# Altium PCB ThermoFlagger.PcbDoc
Units mil, origin at the board's own origin, x right, y up, seen from the top; angles counter-clockwise.
Board outline 1125 x 1100 mil, 2 copper layers (Top Layer, Bottom Layer), stack 65.792 mil thick; 37 components, 19 nets, 96 pads, 215 vias.
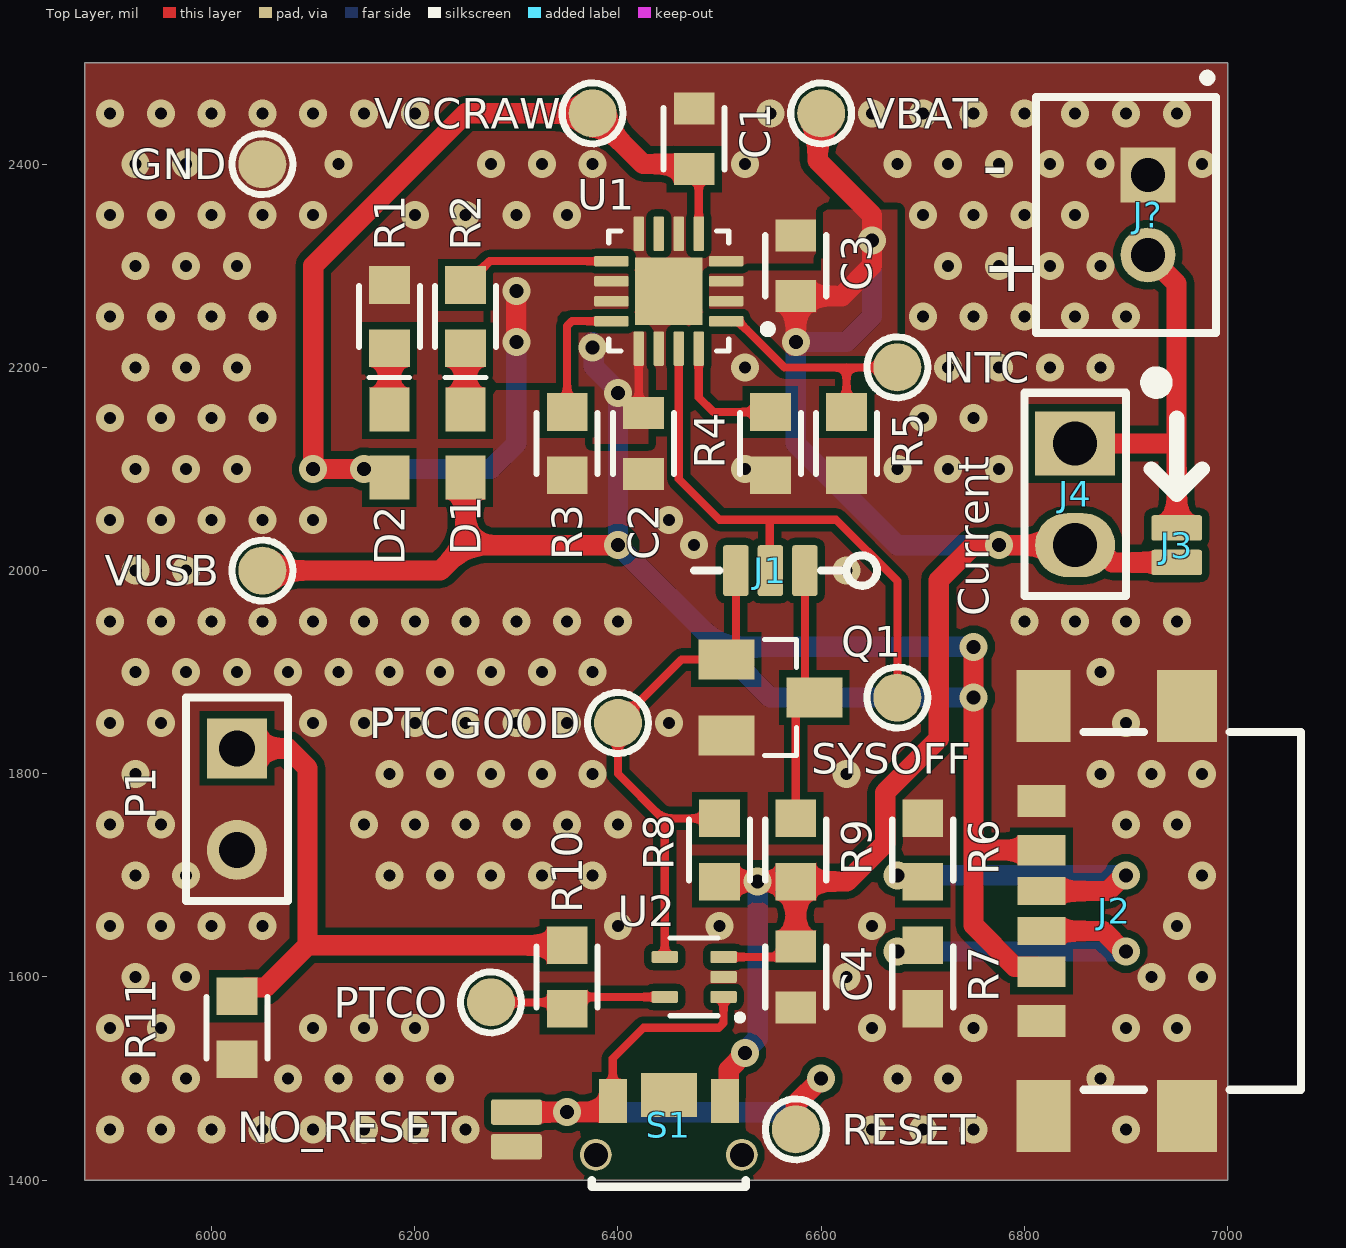
[diagram p0: Top Layer view]
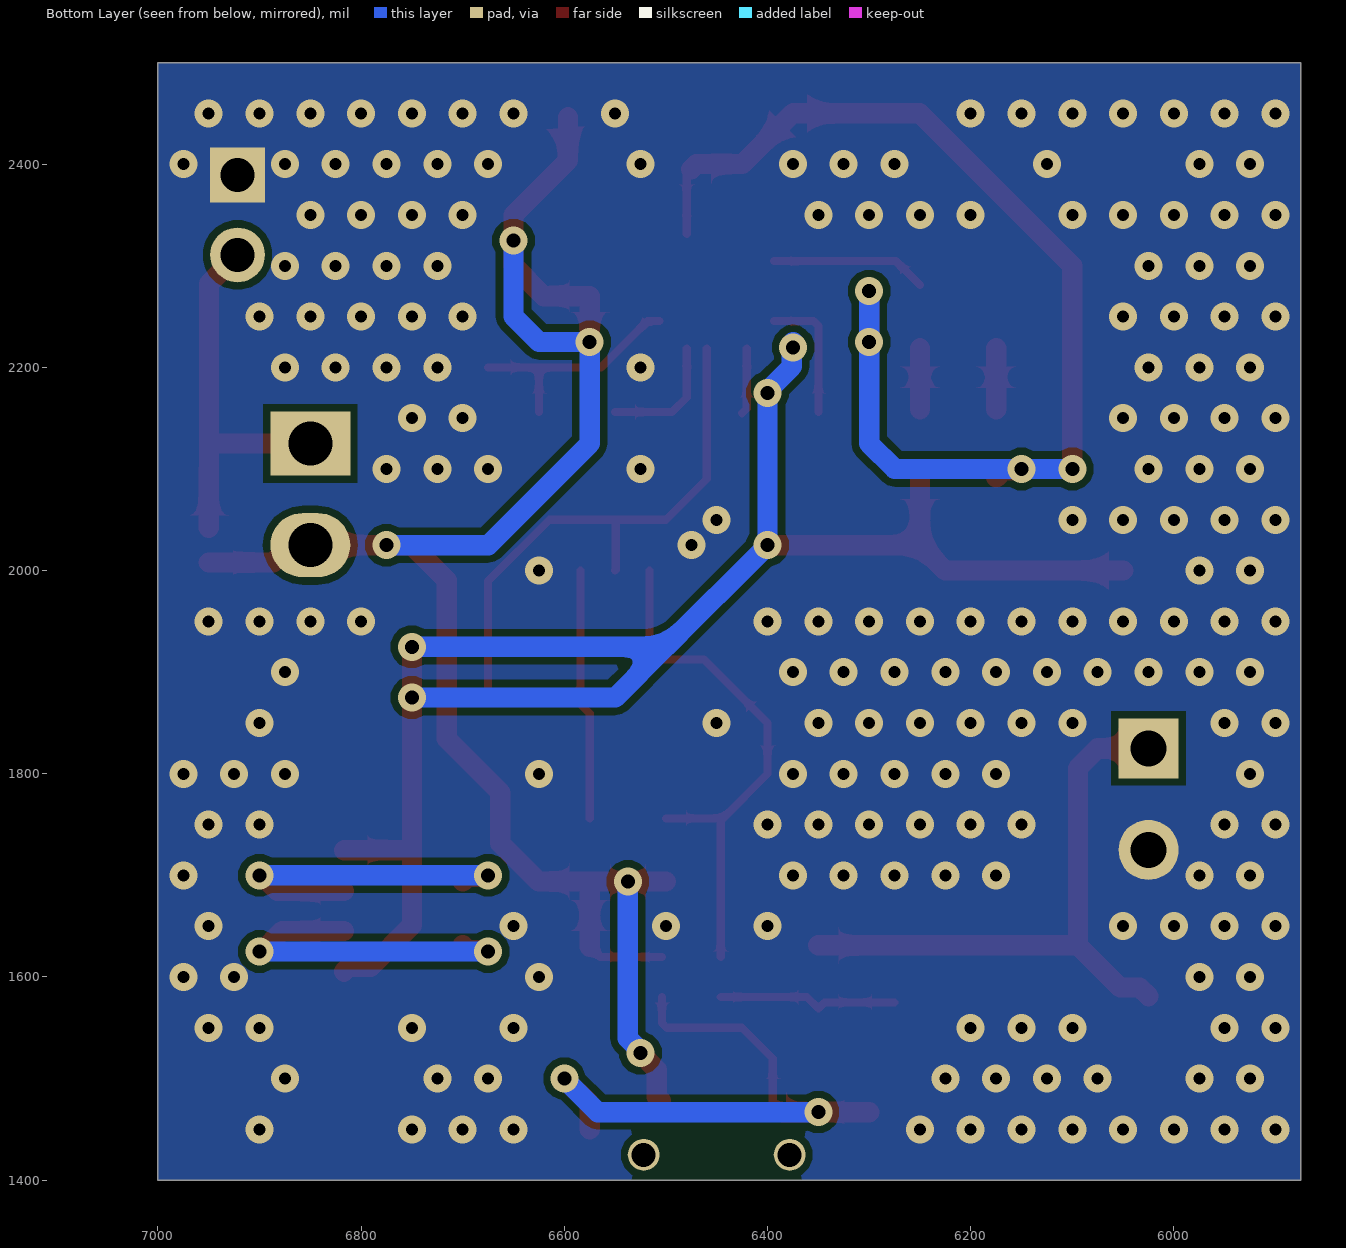
[diagram p1: Bottom Layer view, seen from below]
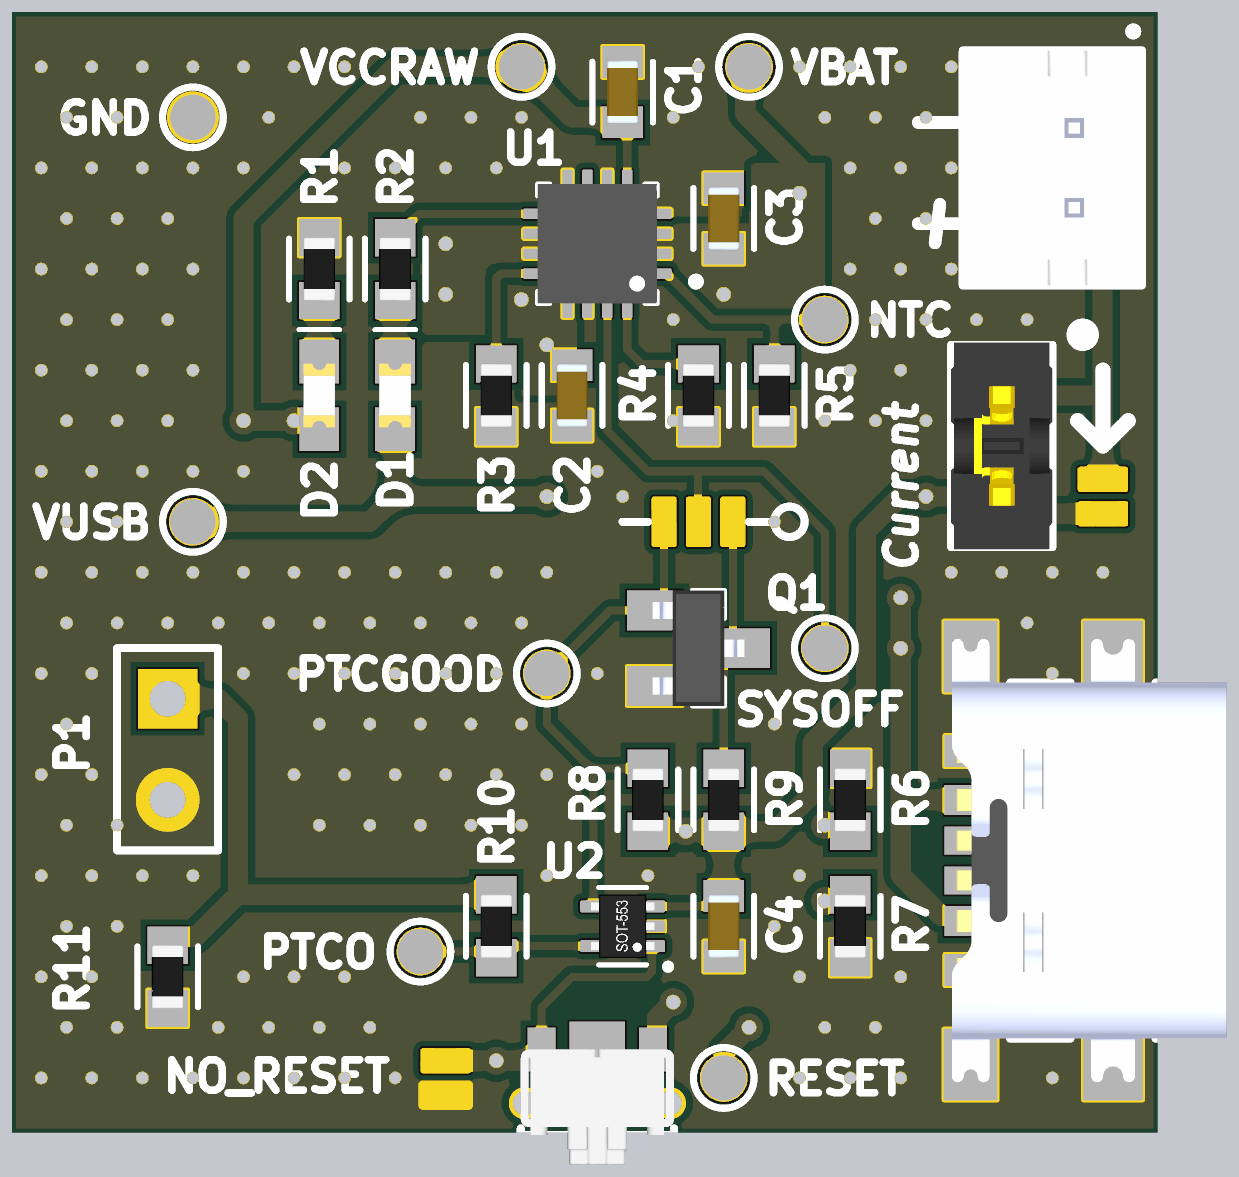
[diagram p2: 3D render of the assembled board from above, using the file's embedded part models]

## Layer stack, top to bottom
Top Solder: solder mask 0.4, Solder Resist, Dk 3.5
Top Layer: signal copper 1.4
Dielectric 1: dielectric 62.9921, FR-4, Dk 4.8
Bottom Layer: signal copper 1.4
Bottom Solder: solder mask 0.4, Solder Resist, Dk 3.5

## Board outline
5875,1400 5875,2500 7000,2500 7000,1400

## Design rules (kind name [scope] priority, off if disabled: settings)
Clearance Clearance_RF [InNetClass('RF')] p1: gap=6 ignorepadtopadclearanceinfootprint=TRUE
Clearance [All] p2: gap=7 ignorepadtopadclearanceinfootprint=TRUE
HoleSize [All] p1: absolutevalues=TRUE maxlimit=200 minlimit=1 maxpercent=80.000 minpercent=20.000
MinimumSolderMaskSliver [All] p1: minsoldermaskwidth=2
PolygonConnect GND_Planes [InNet('GND') vs InPolygonClass('PLANES')] p1: thpad.connectstyle=Direct thpad.reliefconductorwidth=10 thpad.reliefentries=4 thpad.polygonreliefangle="90 Angle" thpad.airgapwidth=10 smdpad.connectstyle=Relief smdpad.reliefconductorwidth=20 smdpad.reliefentries=4 smdpad.polygonreliefangle="90 Angle" smdpad.airgapwidth=10 via.connectstyle=Direct via.reliefconductorwidth=10 via.reliefentries=4 via.polygonreliefangle="90 Angle" via.airgapwidth=10
PolygonConnect [All] p2: connectstyle=Direct reliefconductorwidth=10 reliefentries=4 polygonreliefangle="90 Angle" airgapwidth=10
RoutingVias [All] p1: holewidth=13.78 width=27.56 viastyle="Through Hole" minholewidth=11.81 minwidth=25.59 maxholewidth=19.68 maxwidth=33.46
ShortCircuit "Schematic Short-Circuit Constraint_1" [InComponent('J3')] p1: allowed=TRUE
ShortCircuit "Schematic Short-Circuit Constraint" [InComponent('NO_RESET')] p2: allowed=TRUE
ShortCircuit [All] p3: allowed=FALSE
SilkToSilkClearance [All] p1: silktosilkclearance=1
SilkToSolderMaskClearance [IsPad] p1: minsilkscreentomaskgap=1 clearancetoexposedcopper=TRUE
SolderMaskExpansion [All] p1: expansion=2 istentingtop=FALSE
Width Width_RF [InNetClass('RF')] p1: maxlimit=38 minlimit=8 preferedwidth=38
Width [All] p2: maxlimit=40 minlimit=8 preferedwidth=10
25 further rules are at their usual default settings.

## Components (designator, comment, footprint, x,y, rotation, side; value= is the part's Value field where it differs from the comment)
C1 "4.7uF/16V" C0603 6475,2425 r90 top value=4.7uF
C2 "1uF/16V" C0603 6425,2125 r270 top
C3 "4.7uF/16V" C0603 6575,2300 r90 top value=4.7uF
C4 "1uF/16V" C0603 6575,1600 r270 top
D1 "GREEN" "LED 0603" 6250,2125 r90 top
D2 "RED" "LED 0603" 6175,2125 r90 top
GND "Test point 1.2mm" TEST_POINT_1.2MM 6050,2400 r0 top
J1 "SMD NO" JUMPER_SMD_NO_2WAY 6550,2000 r180 top net-tie
J2 "USB4135-GF-A_REVA" "GCT_USB4135 16-pin" 6960,1665 r90 top
J3 "SMD NO" JUMPER_SMD_NO 6950,2025 r90 top net-tie
J4 "Header Male 1x02 Jumper" "Header 1x02 Jumper" 6850,2125 r0 top
J? "JST-PH 2-Pin" JST_B2B-PH-K-S(LF)(SN) 6900,2350 r90 top
NO_RESET "SMD NO" JUMPER_SMD_NO 6300,1450 r90 top net-tie
NTC "Test point 1.2mm" TEST_POINT_1.2MM 6675,2200 r90 top
P1 "JUMPER PTH" HDR1X2 6025,1825 r270 top
PTCGOOD "Test point 1.2mm" TEST_POINT_1.2MM 6400,1850 r90 top
PTCO "Test point 1.2mm" TEST_POINT_1.2MM 6275,1575 r0 top
Q1 "0.19A/1.1V" SOT-23-3 6550,1875 r270 top
R1 "1.2K" R0603 6175,2250 r270 top
R2 "1.2K" R0603 6250,2250 r270 top
R3 "1.2K" R0603 6350,2125 r90 top
R4 "1.5K" R0603 6550,2125 r90 top
R5 "10K" R0603 6625,2125 r90 top value=10kR
R6 "5.1K" R0603 6700,1725 r270 top
R7 "5.1K" R0603 6700,1600 r90 top
R8 "100K" R0603 6500,1725 r270 top
R9 "100K" R0603 6575,1725 r270 top
R10 "260K" R0603 6350,1600 r270 top
R11 "1M" R0603 6025,1550 r90 top
RESET "Test point 1.2mm" TEST_POINT_1.2MM 6575,1450 r90 top
S1 "TL6340AF160Q 0.8mm" TL6340AF160Q 6450,1425 r180 top
SYSOFF "Test point 1.2mm" TEST_POINT_1.2MM 6675,1875 r90 top
U1 "BQ24075RGTR" VQFN16 6450,2275 r180 top
U2 "TCTH012AE" "SOT-553 (ESV)" 6475,1600 r180 top
VBAT "Test point 1.2mm" TEST_POINT_1.2MM 6600,2450 r0 top
VCCRAW "Test point 1.2mm" TEST_POINT_1.2MM 6375,2450 r90 top
VUSB "Test point 1.2mm" TEST_POINT_1.2MM 6050,2000 r0 top

## Footprints (in the part's own frame and the unit in brackets; to place one, negate y for a bottom-side part, rotate by r counter-clockwise, add the part's x,y. Pads: shape width x height; smd on the part's side, far side on the other; paste and mask are expansions set on the pad)
C0603 [mm]
  rect 0.8x1.02 smd: 1(-0.759,0) 2(0.759,0)
  silkscreen extent -0.76,-0.76 0.76,0.76, body extent -0.8,-0.4 0.8,0.4, height 0.81
"GCT_USB4135 16-pin" [mm]
  rect 0.7x1.2 smd: A5(-0.5,3.635) B5(0.5,3.635)
  rect 0.76x1.2 smd: A9(1.52,3.635) B9(-1.52,3.635)
  rect 0.8x1.2 smd: A12(2.75,3.635) B12(-2.75,3.635)
  rect 1.8x1.35 smd: S1(-5.125,3.58) S4(5.125,3.58)
  rect 1.8x1.5 smd: S2(-5.125,0) S3(5.125,0)
  silkscreen extent -4.47,-2.85 4.47,2.59, body extent -5.57,-2.85 5.57,4.05, height 3.25
HDR1X2 [mm] "Connector; Header; 2 Position"
  rect 1.5x1.5 hole 0.9: 1(0,0)
  round 1.5 hole 0.9: 2(2.54,0)
  silkscreen extent -1.27,-1.27 3.81,1.27
"Header 1x02 Jumper" [mm]
  rect 2x1.6 hole 1.1: 1(0,0)
  oval 2x1.6 hole 1.1: 2(0,-2.54)
  silkscreen extent -1.27,-3.81 2.24,1.73, body extent -1.27,-3.87 1.27,1.33, height 8.6
JST_B2B-PH-K-S(LF)(SN) [mm]
  rect 1.368x1.368 hole 0.86: 1(1,-0.55)
  round 1.368 hole 0.86: 2(-1,-0.55)
  silkscreen extent -2.95,-2.25 3.53,2.25, body extent -2.95,-2.25 2.95,2.25, height 6.01
JUMPER_SMD_NO [mil]
  rrect20% 25x50 smd paste-99999: 1(-17,0) 2(17,0)
JUMPER_SMD_NO_2WAY [mil]
  rrect20% 25x50 smd paste-99999: 1(-34,0) 2(0,0) 3(34,0)
"LED 0603" [mm]
  rect 1.1x1 smd: 1(-0.85,0) 2(0.85,0)
  silkscreen extent 1.65,-0.51 1.65,0.51, body extent -0.8,-0.4 0.8,0.4, height 0.4
R0603 [mm]
  rect 0.94x1.02 smd: 1(-0.79,0) 2(0.79,0)
  silkscreen extent -0.76,-0.76 0.76,0.76, body extent -0.8,-0.4 0.8,0.4, height 0.51
SOT-23-3 [mm]
  rect 1x1.4 smd: 1(-0.95,-1.1) 2(0.95,-1.1) 3(0,1.1)
  silkscreen extent -1.45,-0.15 1.45,0.65, body extent -1.45,-1.15 1.45,1.15, height 1.1
"SOT-553 (ESV)" [mm] "ESV"
  rrect25% 0.66x0.3 smd: 1(-0.735,0.5) 2(-0.735,0) 3(-0.735,-0.5) 4(0.735,-0.5) 5(0.735,0.5)
  silkscreen extent -1.22,-0.97 0.6,1.09, body extent -0.8,-0.8 0.8,0.8, height 0.51
TEST_POINT_1.2MM [mm]
  round 1.2 smd paste-0.025: 1(0,0)
  silkscreen extent -0.76,-0.76 0.76,0.76
TL6340AF160Q [mm]
  rect 0.7x1.1 smd: 1(-1.4,-1.35) 2(1.4,-1.35)
  round 0.8 hole 0.6 mask+0: SH1(-1.825,0) SH2(1.825,0)
  rect 1.4x1.1 smd: SH3(0,-1.5)
  silkscreen extent -1.92,0.63 1.92,0.8, body extent -1.92,-1.35 1.92,1.55, height 1.55
VQFN16 [mm]
  rrect25% 0.86x0.26 smd: 1(-1.435,0.75) 2(-1.435,0.25) 3(-1.435,-0.25) 4(-1.435,-0.75) 9(1.435,-0.75) 10(1.435,-0.25) 11(1.435,0.25) 12(1.435,0.75)
  rrect25% 0.26x0.86 smd: 5(-0.75,-1.435) 6(-0.25,-1.435) 7(0.25,-1.435) 8(0.75,-1.435) 13(0.75,1.435) 14(0.25,1.435) 15(-0.25,1.435) 16(-0.75,1.435)
  rect 1.68x1.68 smd paste-2: 17(0,0)
  silkscreen extent -2.57,-1.5 1.5,1.5, body extent -1.5,-1.5 1.5,1.5, height 1

## Part data
C1 C3: library part "C0603 4.7uF/16V", "0603 4.7 uF 16 V ±10% Tolerance X5R Multilayer Ceramic Capacitor", Case Code (Imperial)=0603, Case Code (Metric)=1608, Manufacturer=Murata, Manufacturer Part Number=GRT188R61C475KE13D, Max Operating Temperature=85°C, Min Operating Temperature=-55°C, Ratings=AEC-Q200, Supplier Part Number 1=81-GRT188R61C475KE3D, Tolerance=10%, Voltage Rating=16V, Case/Package=0603, Category="Ceramic Capacitors", Length=0.063inch, Mounting Technology="Surface Mount", Packaging="Cut Tape", Pricing 1="1=0.16, 10=0.066, 50=0.066, 100=0.038, 1000=0.034, 10000=0.029 (USD)", RoHS=Yes, RoHS Compliant=Yes, Series=GRT, Stock 1=39950, Supplier 1=Mouser, Thickness=0.035inch, Width=0.031inch
C2 C4: library part "C0603 1uF/16V X5R", "MLCC 1uF 16V X5R 10% SMD 0603 85C Paper T/R", Capacitance=1uF, Case Code (Imperial)=0603, Case Code (Metric)=1608, Dielectric=X5R, Manufacturer=Yageo, Manufacturer Part Number=CC0603KRX5R7BB105, Max Operating Temperature=85°C, Min Operating Temperature=-55°C, Package Quantity=4000, Resistor Type=Ceramic, Supplier Part Number 1=603-CC603KRX5R7BB105, Tolerance=10%, Voltage Rating=16V, Case/Package=0603, Category="Ceramic Capacitors", Construction=Flat, Depth=0.8mm, Dissipation Factor=7%, Halogen Free="Halogen Free", Height=0.8mm, Lead Free="Lead Free", Length=1.6mm, Mount="Surface Mount", Number of Pins=2, Packaging="Tape and Reel", Pricing 1="1=0.17000, 10=0.09100, 50=0.09100, 100=0.04100, 1000=0.03400, 10000=0.02100 (USD)", Radiation Hardening=No, REACH SVHC=Unknown, RoHS=Yes, RoHS Compliant=Yes, Series=CC, Stock 1=726921, Supplier 1=Mouser, Termination=SMD/SMT, Thickness=0.035inch, Voltage Rating (DC)=16V, Width=0.8mm
D1: library part "LED 0603 GREEN", "Green 575nm LED Indication - Discrete 2V 0603", Case Code (Imperial)=0603, Case Code (Metric)=1608, Color=Green, Forward Voltage=2V, Manufacturer="Wurth Electronics", Manufacturer Part Number=150060VS55040, Supplier Part Number 1=710-150060VS55040, Test Current=20mA, Case/Package=0603, Category=LEDs, Dominant Wavelength=573nm, Height=0.5mm, Length=1.6mm, Lens Size=0.8mm, Lens Style=Flat, Lens Transparency=Diffused, Luminous Intensity=60mcd, Mount="Surface Mount", Packaging="Cut Tape", Pricing 1="1=0,18000, 10=0,16200, 50=0,16200, 100=0,14700, 1000=0,11700, 10000=0,11700 (USD)", RoHS=No, Stock 1=24940, Supplier 1=Mouser, Viewing Angle=140°, Width=0.8mm
D2: library part "LED 0603 RED", "Red 625nm LED Indication - Discrete 2V 0603", Case Code (Imperial)=0603, Case Code (Metric)=1608, Color=Red, Forward Voltage=2V, Manufacturer="Wurth Electronics", Manufacturer Part Number=150060RS55040, Supplier Part Number 1=710-150060RS55040, Test Current=20mA, Case/Package=0603, Category=LEDs, Dominant Wavelength=624nm, Height=0.5mm, Length=1.6mm, Lens Size=0.8mm, Lens Style=Flat, Lens Transparency=Diffused, Luminous Intensity=90mcd, Mount="Surface Mount", Packaging="Tape and Reel", Pricing 1="1=0.18000, 10=0.16200, 100=0.14700, 500=0.13200, 1000=0.11700, 2000=0.11700 (USD)", RoHS=No, Stock 1=8586, Supplier 1=Mouser, Viewing Angle=140°, Width=0.8mm
GND NTC PTCGOOD PTCO RESET SYSOFF VBAT VCCRAW VUSB: library part "Test point", "SMD test point"
J1: library part JUMPER_SMD_NO_2WAY
J2: "Usb C Rec Gf Ra 6P SMT & SMT She", Manufacturer 1="Global Connector Technology", Manufacturer Part Number 1=USB4135-GF-A, Supplier Part Number 1=640-USB4135-GF-A, Category=Connectors, Pricing 1="1=0.67300, 50=0.59700, 100=0.56000, 250=0.52200, 500=0.46600, 1000=0.43300, 1500=0.40000, 3000=0.33600 (USD)", RoHS=No, Stock 1=1196, Supplier 1=Mouser
J3 NO_RESET: library part JUMPER_SMD_NO, Rule="Short-Circuit Constraint [Short Circuit - Allowed]"
J4: library part "Header Male Jumper 1x02", "Header Male Jumper 1x02"
J?: "JST (JAPAN SOLDERLESS TERMINALS) - B2B-PH-K-S(LF)(SN) - Pin Header, Top Entry, Wire-to-Board, 2 mm, 1 Rows, 2 Contacts, Through Hole, PH Series", Manufacturer=JST, Manufacturer Part Number=B2B-PH-K-S(LF)(SN), Supplier Part Number 1=C131337, Category=Connectors, Height=0.35inch, Length=0.2inch, Pricing 1="20=0.03960, 200=0.03310, 600=0.02840, 2000=0.02160, 10000=0.02100, 20000=0.02070 (USD)", RoHS=Yes, Stock 1=3352380, Supplier 1=LCSC, Weight=0.0625lb, Width=0.24inch
P1: library part "JUMPER PTH NO", "JUMPER PTH NO"
Q1: library part "MOSFET N-CH NX7002AK,215", "MOSFET Transistor, N Channel, 190 mA, 60 V, 3 ohm, 10 V, 1.6 V", Manufacturer=Nexperia, Manufacturer Part Number=NX7002AK,215, Supplier Part Number 1=771-NX7002AK,215, Category=MOSFETs, Pricing 1="1=0.18, 10=0.131, 50=0.131, 100=0.059, 1000=0.036, 10000=0.021 (USD)", RoHS=Yes, RoHS Compliant=Yes, Stock 1=451760, Supplier 1=Mouser, Supplier 2=LCSC, Supplier Part Number 2=C255584
R1 R2 R3: library part "R0603 1.2K", "RES 0603 1.2K OHM 1% 1/10W", Case Code (Imperial)=0603, Case Code (Metric)=1608, Manufacturer=Yageo, Manufacturer Part Number=RC0603FR-071K2L, Max Operating Temperature=155°C, Max Power Dissipation=100mW, Min Operating Temperature=-55°C, Resistance=1.2kR, Resistance Tolerance=1%, Resistor Type="Thick Film", Supplier Part Number 1=603-RC0603FR-071K2L, Temperature Coefficient=100ppm/°C, Voltage Rating=50V, Case/Package=0603, Category="Chip SMD Resistors", ComponentLink1Description=http://www.farnell.com/datasheets/443971.pdf?src-supplier=Farnell, ComponentLink1URL=http://www.farnell.com/datasheets/443971.pdf?src-supplier=Farnell, ComponentLink2Description=http://www.farnell.com/datasheets/1868787.pdf?src-supplier=Farnell, ComponentLink2URL=http://www.farnell.com/datasheets/1868787.pdf?src-supplier=Farnell, ComponentLink3Description=http://www.farnell.com/datasheets/2167052.pdf?src-supplier=Farnell, ComponentLink3URL=http://www.farnell.com/datasheets/2167052.pdf?src-supplier=Farnell, ComponentLink4Description=http://www.mouser.com/ds/2/447/RC0603-272842.pdf?src-supplier=Mouser, ComponentLink4URL=http://www.mouser.com/ds/2/447/RC0603-272842.pdf?src-supplier=Mouser, ComponentLink5Description=http://components.arrow.com/part/dataview/0323_00047720?src-supplier=Arrow+Europe, ComponentLink5URL=http://components.arrow.com/part/dataview/0323_00047720?src-supplier=Arrow+Europe, ComponentLink6Description=http://www.farnell.com/datasheets/443971.pdf?src-supplier=Element14, ComponentLink6URL=http://www.farnell.com/datasheets/443971.pdf?src-supplier=Element14, ComponentLink7Description=http://www.farnell.com/datasheets/2167052.pdf?src-supplier=Newark, ComponentLink7URL=http://www.farnell.com/datasheets/2167052.pdf?src-supplier=Newark, ComponentLink8Description=http://www.farnell.com/datasheets/1868787.pdf?src-supplier=Element14, ComponentLink8URL=http://www.farnell.com/datasheets/1868787.pdf?src-supplier=Element14, ComponentLink9Description=http://www.farnell.com/datasheets/2167052.pdf?src-supplier=Element14, ComponentLink9URL=http://www.farnell.com/datasheets/2167052.pdf?src-supplier=Element14, ComponentLink10Description=http://www.yageo.com/documents/recent/PYu-RC0603_51_RoHS_L_7.pdf?src-supplier=Future+Electronics, ComponentLink10URL=http://www.yageo.com/documents/recent/PYu-RC0603_51_RoHS_L_7.pdf?src-supplier=Future+Electronics, ComponentLink11Description=https://www.verical.com/server-webapp/html/getDatasheet?partID=326670&src-supplier=Verical, ComponentLink11URL=https://www.verical.com/server-webapp/html/getDatasheet?partID=326670&src-supplier=Verical, ComponentLink12Description=http://www.farnell.com/datasheets/1868787.pdf?src-supplier=Newark, ComponentLink12URL=http://www.farnell.com/datasheets/1868787.pdf?src-supplier=Newark, ComponentLink13Description=http://www.yageo.com/documents/recent/PYu-RC_Group_51_RoHS_L_9.pdf?src-supplier=Digi-Key, ComponentLink13URL=http://www.yageo.com/documents/recent/PYu-RC_Group_51_RoHS_L_9.pdf?src-supplier=Digi-Key, ComponentLink14Description=http://www.yageo.com/documents/recent/PYu-RC_Group_51_RoHS_L_10.pdf?src-supplier=Digi-Key, ComponentLink14URL=http://www.yageo.com/documents/recent/PYu-RC_Group_51_RoHS_L_10.pdf?src-supplier=Digi-Key, Construction=Rectangular, Depth=0.8mm, Features="Moisture Resistant", Height=0.45mm, Lead Free="Lead Free", Length=1.6mm, Military Standard=Not, Number of Pins=2, Number of Terminations=2, Packaging="Tape and Reel", Power Rating=100mW, Pricing 1="1=0.10000, 10=0.02400, 50=0.02400, 100=0.01000, 1000=0.00400, 10000=0.00300 (USD)", REACH SVHC="No SVHC", RoHS=Yes, RoHS Compliant=Yes, Series=RC, Size Code=0603, Stock 1=27884, Supplier 1=Mouser, Termination=SMD/SMT, Tolerance=1%, Voltage Rating (DC)=50V, Width=0.8mm
R4: library part "R0603 1.5K", "RES 0603 1.5K OHM 0.5% 1/10W", Case Code (Imperial)=0603, Case Code (Metric)=1608, Manufacturer=Yageo, Manufacturer Part Number=RC0603FR-071K5L, Max Operating Temperature=155°C, Max Power Dissipation=100mW, Min Operating Temperature=-55°C, Package Quantity=1, Resistance=1.5kR, Resistor Type="Thick Film", Supplier Part Number 1=603-RC0603FR-071K5L, Temperature Coefficient=100ppm/°C, Tolerance=1%, Voltage Rating=50V, Case/Package=0603, Category="Chip SMD Resistors", Depth=0.8mm, Features="Moisture Resistant", Height=0.022inch, Lead Free="Lead Free", Length=0.063inch, Military Standard=Not, Number of Pins=2, Number of Terminations=2, Packaging="Tape and Reel", Power Rating=100mW, Pricing 1="1=0.10000, 10=0.01800, 50=0.01800, 100=0.00600, 1000=0.00500, 10000=0.00300 (USD)", REACH SVHC="No SVHC", RoHS=Yes, Stock 1=312486, Supplier 1=Mouser, Termination=SMD/SMT, Voltage Rating (DC)=50V, Width=0.031inch
R5: library part "R0603 10K", "SMD Chip Resistor, 10 kOhm, ± 1%, 100 mW, 0603 [1608 Metric], Thick Film, Anti-Sulfur", Case Code (Imperial)=0603, Case Code (Metric)=1608, Manufacturer 1=Yageo, Manufacturer Part Number 1=AF0603FR-0710KL, Max Operating Temperature=155°C, Max Power Dissipation=100mW, Min Operating Temperature=-55°C, Package Quantity=1, Supplier Part Number 1=603-AF0603FR-0710KL, Temperature Coefficient=100ppm/°C, Tolerance=1%, Voltage Rating=50V, Case/Package=0603, Category="Chip SMD Resistors", Features="Moisture Resistant,Anti-Sulfur", Height=0.022inch, Lead Free=5697LeadFree, Length=0.063inch, Number of Terminations=2, Packaging="Tape and Reel", Power Rating=100mW, Pricing 3="5000=0.00223, 10000=0.00219, 20000=0.00213 (USD)", RoHS=Yes, RoHS Compliant=Yes, Series=AF, Stock 3=5000, Supplier 1=Mouser, Supplier 2=Mouser, Supplier Part Number 2=667-ERJ-3EKF1002V, Termination=SMD/SMT, Width=0.031inch
R6 R7: library part "R0603 5.1K", "RES 0603 5.1K OHM 1% 1/10W", Case Code (Imperial)=0603, Case Code (Metric)=1608, Manufacturer=Yageo, Manufacturer Part Number=RC0603FR-075K1L, Max Operating Temperature=155°C, Max Power Dissipation=100mW, Min Operating Temperature=-55°C, Package Quantity=1, Resistance=5.1kR, Resistor Type="Thick Film", Supplier Part Number 1=603-RC0603FR-075K1L, Temperature Coefficient=100ppm/°C, Tolerance=1%, Voltage Rating=50V, Case/Package=0603, Category="Chip SMD Resistors", Depth=0.8mm, Features="Moisture Resistant", Height=0.022inch, Lead Free="Lead Free", Length=0.063inch, Military Standard=Not, Number of Pins=2, Number of Terminations=2, Packaging="Tape and Reel", Power Rating=100mW, REACH SVHC="No SVHC", RoHS=Yes, Stock 1=557916, Supplier 1=Mouser, Termination=SMD/SMT, Voltage Rating (DC)=50V, Width=0.031inch
R8 R9: library part "R0603 100K", "RES 0603 100K OHM 1% 1/10W", Case Code (Imperial)=0603, Case Code (Metric)=1608, Manufacturer 1=Yageo, Manufacturer Part Number 1=RC0603FR-07100KL, Max Operating Temperature=155°C, Min Operating Temperature=-55°C, Power Rating=100mW, Resistance=100kR, Resistor Type="Thick Film", Supplier Part Number 1=603-RC0603FR-07100KL, Temperature Coefficient=100ppm/°C, Tolerance=1%, Voltage Rating=50V, Working Voltage=75V, Case/Package=0603, Category="Chip SMD Resistors", Depth=0.8mm, Height=0.45mm, Lead Free="Lead Free", Length=1.6mm, Military Standard=Not, Number of Pins=2, Number of Terminations=2, Packaging="Tape and Reel", Pricing 1="1=0.10000, 10=0.02100, 100=0.00900, 1000=0.00400, 5000=0.00300, 10000=0.00200 (USD)", REACH SVHC="No SVHC", RoHS=Yes, Stock 1=4536807, Supplier 1=Mouser, Termination=SMD/SMT, Voltage Rating (DC)=50V, Width=0.8mm
R10: library part "R0603 215K", "RES 0603 215K OHM 1% 1/10W", Case Code (Imperial)=0603, Case Code (Metric)=1608, Manufacturer 1=Yageo, Manufacturer Part Number 1=RC0603FR-07215KL, Max Operating Temperature=155°C, Max Power Dissipation=100mW, Min Operating Temperature=-55°C, Package Quantity=1, Resistance=215kR, Resistor Type="Thick Film", Supplier Part Number 1=603-RC0603FR-07215KL, Temperature Coefficient=100ppm/°C, Tolerance=1%, Voltage Rating=75V, Voltage Rating (DC)=50V, Case/Package=0603, Category="Chip SMD Resistors", Construction=Rectangular, Depth=0.8mm, Features="Moisture Resistant", Height=0.022inch, Lead Free="Lead Free", Length=1.6mm, Military Standard=Not, Number of Terminations=2, Packaging="Tape and Reel", Power Rating=100mW, Pricing 1="1=0,10000, 10=0,01800, 50=0,01800, 100=0,00700, 1000=0,00400, 10000=0,00200 (USD)", RoHS=Yes, RoHS Compliant=Yes, Series=RC, Size Code=0603, Stock 1=61268, Supplier 1=Mouser, Supplier 2=Mouser, Supplier Part Number 2=603-AC0603FR-07215KL, Termination=SMD/SMT, Weight=7.1E-05oz, Width=0.031inch
R11: library part "R0603 1M", "RES 0603 1M OHM 1% 1/10W", Case Code (Imperial)=0603, Case Code (Metric)=1608, Manufacturer 1=Yageo, Manufacturer Part Number 1=RC0603FR-071ML, Max Operating Temperature=155°C, Min Operating Temperature=-55°C, Package Quantity=5000, Power Rating=100mW, Resistance=1MR, Resistor Type="Thick Film", Supplier Part Number 1=603-RC0603FR-071ML, Temperature Coefficient=100ppm/°C, Tolerance=1%, Voltage Rating=75V, Voltage Rating (DC)=50V, Application(s)="HIGH RELIABILITY", Case/Package=0603, Category="Chip SMD Resistors", Depth=0.8mm, Height=0.45mm, Lead Free="Lead Free", Length=1.6mm, Military Standard=Not, Number of Pins=2, Packaging="Cut Tape", Pricing 1="1=0.10000, 10=0.01800, 50=0.01800, 100=0.00700, 1000=0.00400, 10000=0.00200 (USD)", REACH SVHC="No SVHC", RoHS=Yes, RoHS Compliant=Yes, Series=RC, Stock 1=1321822, Supplier 1=Mouser, Technology="THICK FILM", Termination=SMD/SMT, Type="General Purpose", Weight=0.000847oz, Width=0.8mm
S1: "TACTILE SWITCH, SPST, 0.02A/12VDC, SMD; Product Range: TL6340 Series; Actuator Orientation: Side Actuated; Switch...", Manufacturer=E-Switch, Manufacturer Part Number=TL6340AF160Q, Supplier Part Number 1=612-TL6340AF160QG, Category="Tactile Switches", Parameter 1=$0.36, Pricing 1="1=0.51, 10=0.478, 50=0.478, 100=0.46, 1000=0.36, 10000=0.255 (USD)", RoHS=Yes, Stock 1=2636, Supplier 1=Mouser, Supplier 2=LCSC, Supplier Part Number 2=C4944967
U1: "IC LI-ION CHARGE MGMT 16-QFN", Battery Pack Voltage=4.2V, Case/Package=VQFN, Manufacturer="Texas Instruments", Max Charge Current=1.5A, Max Operating Temperature=125°C, Max Supply Voltage=6.4V, Min Input Voltage=4.3V, Min Operating Temperature=-40°C, Min Supply Voltage=4.35V, Package Quantity=3000, Supplier Part Number 1=595-BQ24075RGTR, Battery Chemistry=LITHIUM-ION, Category="Battery Management", ComponentLink1Description=https://datasheet.ciiva.com/15114/getdatasheetpartid-471953-15114762.pdf?src-supplier=Verical, ComponentLink1URL=https://datasheet.ciiva.com/15114/getdatasheetpartid-471953-15114762.pdf?src-supplier=Verical, ComponentLink2Description=https://datasheet.ciiva.com/3214/bq24079-3214043.pdf?src-supplier=Avnet, ComponentLink2URL=https://datasheet.ciiva.com/3214/bq24079-3214043.pdf?src-supplier=Avnet, ComponentLink3Description=https://datasheet.ciiva.com/1934/bq24072-1934514.pdf?src-supplier=Digi-Key, ComponentLink3URL=https://datasheet.ciiva.com/1934/bq24072-1934514.pdf?src-supplier=Digi-Key, Contact Plating=Gold, Fault Protection="Over Voltage,Over Temperature,Short Circuit,Reverse Current", Interface=USB, Lead Free="Lead Free", Manufacturer Part Number=BQ24075RGTR, Number of Cells=1, Number of Pins=16, Output Current=1.5A, Output Voltage=4.2V, Packaging="Tape and Reel", Pricing 1="1=2.52000, 10=2.27000, 50=2.14000, 100=1.82000, 1000=1.24000, 10000=1.24000 (USD)", Radiation Hardening=No, RoHS=Yes, RoHS Compliant=Yes, Series=-, Stock 1=21933, Supplier 1=Mouser, Supplier 2=Digi-Key, Supplier 3=Digi-Key, Supplier 4="Arrow Electronics", Supplier Part Number 2=296-38874-1-ND, Supplier Part Number 3=296-38874-2-ND, Supplier Part Number 4=BQ24075RGTR, Weight=0.000808oz
U2: "Supervisory Circuits CMOS Linear IC Over Temp Detection IC IPTCO: 1uA Latching-func PTCGOOD: Push-Pull", Manufacturer 1=Toshiba, Manufacturer Part Number 1=TCTH012AE,LF(CT, Supplier Part Number 1=757-TCTH012AELFCT, Pricing 1="1=0.38, 10=0.296, 50=0.296, 100=0.265, 1000=0.201, 10000=0.154 (USD)", RoHS=No, Stock 1=8000, Supplier 1=Mouser

## Via types
v1: diameter 27.56, hole 11.81, Top Layer to Bottom Layer, tented both sides, 195 vias
v2: diameter 27.56, hole 13.78, Top Layer to Bottom Layer, tented both sides, 20 vias

## Nets (pads, with @x,y where several pads share a name; then routed paths per layer and width w, separated by ;. In a path a pad name is that pad's centre, name@x,y a point inside that pad or via, vN(x,y) a via of type N, cw(c..) or ccw(c..) an arc to the next point about the centre after c; other vN are vias at no path point)
BAT+: J3.2 J4.1 J?.2 | length 380.1
  Top Layer w20: J4.1 6949.7,2125 ; J?.2 6949.7,2282.58 6949.7,2125 ; J3.2 6950,2100 6949.7,2100.3 6949.7,2125
BATT_THERMAL_SENSE: NTC.1 R5.2 U1.1 | length 231.2
  Top Layer w8: U1.1 6518.31,2245.47 6563.78,2200 6625,2200 ; R5.2 6625,2200 ; NTC.1 6625,2200
CHRG: R2.1 U1.9 | length 153.2
  Top Layer w8: R2.1 6273.43,2304.53 U1.9
GND: C1.2 C2.2 C3.2 C4.2 GND.1 J2.A12 J2.B12 J2.S1 J2.S2 J2.S3 J2.S4 J?.1 NO_RESET.1 P1.2 Q1.2 R1.1 R3.1 R4.1 R5.1 R6.1 R7.1 R11.1 U1.4 U1.6 U1.8 U1.14 U1.17 U2.2
  other v1: 5900,1450 5950,1450 6000,1450 6050,1450 6100,1450 6150,1450 6200,1450 6250,1450 6650,1450 6700,1450 6750,1450 6900,1450 5925,1500 5975,1500 6075,1500 6125,1500 6175,1500 6225,1500 6675,1500 6725,1500 6875,1500 5900,1550 5950,1550 6100,1550 6150,1550 6200,1550 6650,1550 6750,1550 6900,1550 6950,1550 5925,1600 5975,1600 6625,1600 6925,1600 6975,1600 5900,1650 5950,1650 6000,1650 6050,1650 6400,1650 6500,1650 6650,1650 6950,1650 5925,1700 5975,1700 6175,1700 6225,1700 6275,1700 6325,1700 6375,1700 6975,1700 5900,1750 5950,1750 6150,1750 6200,1750 6250,1750 6300,1750 6350,1750 6400,1750 6900,1750 6950,1750 5925,1800 6175,1800 6225,1800 6275,1800 6325,1800 6375,1800 6625,1800 6875,1800 6925,1800 6975,1800 5900,1850 5950,1850 6100,1850 6150,1850 6200,1850 6250,1850 6300,1850 6350,1850 6450,1850 6900,1850 5925,1900 5975,1900 6025,1900 6075,1900 6125,1900 6175,1900 6225,1900 6275,1900 6325,1900 6375,1900 6875,1900 5900,1950 5950,1950 6000,1950 6050,1950 6100,1950 6150,1950 6200,1950 6250,1950 6300,1950 6350,1950 6400,1950 6800,1950 6850,1950 6900,1950 6950,1950 5925,2000 5975,2000 6625,2000 6475,2025 5900,2050 5950,2050 6000,2050 6050,2050 6100,2050 6450,2050 5925,2100 5975,2100 6025,2100 6525,2100 6675,2100 6725,2100 6775,2100 5900,2150 5950,2150 6000,2150 6050,2150 6700,2150 6750,2150 5925,2200 5975,2200 6025,2200 6525,2200 6725,2200 6775,2200 6825,2200 6875,2200 5900,2250 5950,2250 6000,2250 6050,2250 6700,2250 6750,2250 6800,2250 6850,2250 6900,2250 5925,2300 5975,2300 6025,2300 6725,2300 6775,2300 6825,2300 6875,2300 5900,2350 5950,2350 6000,2350 6050,2350 6100,2350 6200,2350 6250,2350 6300,2350 6350,2350 6700,2350 6750,2350 6800,2350 6850,2350 5925,2400 5975,2400 6125,2400 6275,2400 6325,2400 6375,2400 6525,2400 6675,2400 6725,2400 6775,2400 6825,2400 6875,2400 6975,2400 5900,2450 5950,2450 6000,2450 6050,2450 6100,2450 6150,2450 6200,2450 6550,2450 6650,2450 6700,2450 6750,2450 6800,2450 6850,2450 6900,2450 6950,2450
NetD1_2: D1.2 R2.2 | length 60.4
  Top Layer w20: D1.2 R2.2
NetD2_2: D2.2 R1.2 | length 60.4
  Top Layer w20: D2.2 R1.2
NetJ2_A5: J2.A5 R7.2 | length 344.1
  Top Layer w20: v2(6675,1625) 6676.45,1626.45 6695.34,1626.45 R7.2 ; J2.A5 6877.64,1645.32 6897.95,1625 v2(6900,1625)
  Bottom Layer w20: v2(6675,1625) v2(6900,1625)
NetJ2_B5: J2.B5 R6.2 | length 342
  Top Layer w20: v2(6675,1700) 6676.45,1698.55 6695.34,1698.55 R6.2 ; J2.B5 6882.64,1684.68 6897.95,1700 v2(6900,1700)
  Bottom Layer w20: v2(6675,1700) v2(6900,1700)
NetNO_RESET_2: NO_RESET.2 RESET.1 S1.2 U2.1 | length 615.2
  Top Layer w8: S1.2@6385.1,1467 6394.88,1476.78 S1.2 6394.88,1519.88 6425,1550 6499.25,1550 6503.94,1554.69 U2.1
  Top Layer w20: NO_RESET.2 v2(6350,1467) S1.2@6385.1,1467 ; RESET.1 6575,1475 v2(6600,1500)
  Bottom Layer w20: v2(6350,1467) 6567,1467 v2(6600,1500)
NetP1_1: P1.1 R10.1 R11.2 | length 597.7
  Top Layer w20: R11.2 6033.5,1589.61 6052.97,1589.61 6094.46,1631.1 ; P1.1 6075,1825 6094.46,1805.54 6094.46,1631.1 ; R10.1 6106.1,1631.1 6094.46,1631.1
NetR3_2: R3.2 U1.12 | length 130.1
  Top Layer w8: R3.2 6350,2240.79 6354.69,2245.47 U1.12
NetR4_2: R4.2 U1.16 | length 124.5
  Top Layer w8: U1.16 6479.53,2170.47 6493.9,2156.1 R4.2
NTC: PTCO.1 R10.2 U2.5 | length 178.3
  Top Layer w8: PTCO.1 6343.9,1575 R10.2 6361.42,1580.32 U2.5
PTCGOOD: J1.3 PTCGOOD.1 Q1.1 R8.1 U2.4 | length 529.5
  Top Layer w8: U2.4 6446.06,1753.94 6443.9,1756.1 ; R8.1 6443.9,1756.1 ; J1.3 6516,1921.71 Q1.1 6462.4,1912.4 PTCGOOD.1 6400,1800 6443.9,1756.1
PTCNEG: J1.1 Q1.3 R9.1 | length 256.9
  Top Layer w8: R9.1 6575,1859.31 6590.69,1875 Q1.3 6584,1884.31 J1.1
SYSOFF: J1.2 SYSOFF.1 U1.15 | length 550.1
  Top Layer w8: U1.15 6459.84,2090.16 6500,2050 6549.34,2050 ; J1.2 6549.34,2000.66 6549.34,2050 ; SYSOFF.1 6675,1989.65 6614.65,2050 6549.34,2050
VBAT: C3.1 C4.1 J3.1 J4.2 R8.2 R9.2 S1.1 U1.2 U1.3 U2.3 VBAT.1 | length 1888
  Top Layer w8: U2.3 6564.8,1619.68 C4.1
  Top Layer w20: R8.2 v2(6537.5,1693.9) R9.2 ; S1.1 6508.9,1481.93 6508.9,1508.9 v2(6525,1525) ; C4.1 R9.2 ; v2(6575,2225) 6575,2265.79 C3.1@6579.33,2270.12 ; C3.1 C3.1@6579.33,2270.12 ; VBAT.1@6596.31,2446.31 6596.31,2403.69 6650,2350 v2(6650,2325) 6650,2300 6620.12,2270.12 C3.1@6579.33,2270.12 ; J3.1 6886.51,2008 6869.51,2025 J4.2 v2(6775,2025) 6750,2025 6715.62,1990.62 6715.62,1834.35 6662.92,1781.65 6662.92,1731.74 6625.08,1693.9 R9.2
  Bottom Layer w20: v2(6525,1525) 6525,1527.05 6537.5,1539.55 v2(6537.5,1693.9) ; v2(6650,2325) 6650,2250 6625,2225 v2(6575,2225) 6575,2125 6675,2025 v2(6775,2025)
VCCRAW: C1.1 D2.1 U1.5 U1.10 U1.11 VCCRAW.1 | length 1214.2
  Top Layer w8: C1.1 6479.53,2390.59 U1.5
  Top Layer w20: D2.1 6167.98,2098.55 6151.45,2098.55 v2(6150,2100) v2(6100,2100) 6100,2300 6250,2450 VCCRAW.1 6424.92,2400.08 6470.04,2400.08 C1.1 ; v2(6300,2225) v2(6300,2275)
  Bottom Layer w20: v2(6100,2100) v2(6150,2100) 6275,2100 6300,2125 v2(6300,2225) v2(6300,2275)
VUSB: C2.1 D1.1 J2.A9 J2.B9 U1.13 VUSB.1 | length 1792
  Top Layer w8: U1.13 6420.47,2159.41 C2.1
  Top Layer w20: VUSB.1 6225,2000 6250,2025 ; D1.1 6250,2025 ; v2(6400,2025) 6250,2025 ; v2(6750,1925) v2(6750,1875) 6750,1725 ; J2.B9 6811.93,1610.12 6790.64,1610.12 6750,1650.76 6750,1725 ; J2.A9 6750.16,1724.84 6750,1725
  Bottom Layer w20: v2@6375,2225 6374.78,2224.78 v2(6374.78,2219.79) 6376.23,2218.34 6376.23,2200.82 6400,2177.05 v2(6400,2175) v2(6400,2025) 6500,1925 ; v2(6750,1875) 6550,1875 6500,1925 ; v2(6750,1925) 6500,1925
pads on no net: S1.SH1 S1.SH2 S1.SH3 U1.7

## Polygon pours and split planes (outlines as drawn)
GND on Top Layer "GND_TOP" (solid, remove dead copper, pour order 13): 5875,1400 5875,2500 7000,2500 7000,1400
VUSB on Top Layer "VUSB_TOP" (solid, remove dead copper, pour order 10): 6430,2240 6430,2125 6375,2125 6375,2175 6370,2180 6360,2180 6360,2235 6365,2240
VBAT on Top Layer "VBAT_TOP" (solid, remove dead copper, pour order 12): 6485,2295 6485,2255 6525,2255 6525,2250 6575,2200 6655,2200 6675,2220 6675,2355 6600,2355 6600,2295
VCCRAW on Top Layer "VCCRAW_TOP" (solid, remove dead copper, pour order 11): 6415,2295 6415,2255 6345,2255 6340,2250 6340,2185 6280,2185 6275,2190 6275,2295
GND on Bottom Layer "GND_BOT" (solid, remove dead copper, pour order 14): 5875,1400 5875,2500 7000,2500 7000,1400

## Silkscreen, mask and mechanical layers (free items; w line width, h text height)
Top Overlay:
  circle w8: c6640,2000 r15
  lines w8: 6475,2000 6500,2000 ; 6600,2000 6625,2000
  lines w15: 6925,2100 6950,2075 ; 6950,2150 6950,2075 ; 6975,2100 6950,2075
  text "-" at 6758.34,2375.01 h50
  text "+" at 6758.34,2275.01 h50
  text "Current" at 6765,1955.03 h30 r90
Board Shape:
  the board outline again, w8